# Altium PCB PCB1.PcbDoc
Units mm, origin at the board's own origin, x right, y up, seen from the top; angles counter-clockwise.
Board outline 95.25 x 74.25 mm, 2 copper layers (Top Layer, Bottom Layer); 41 components, 41 nets, 138 pads, 0 vias.
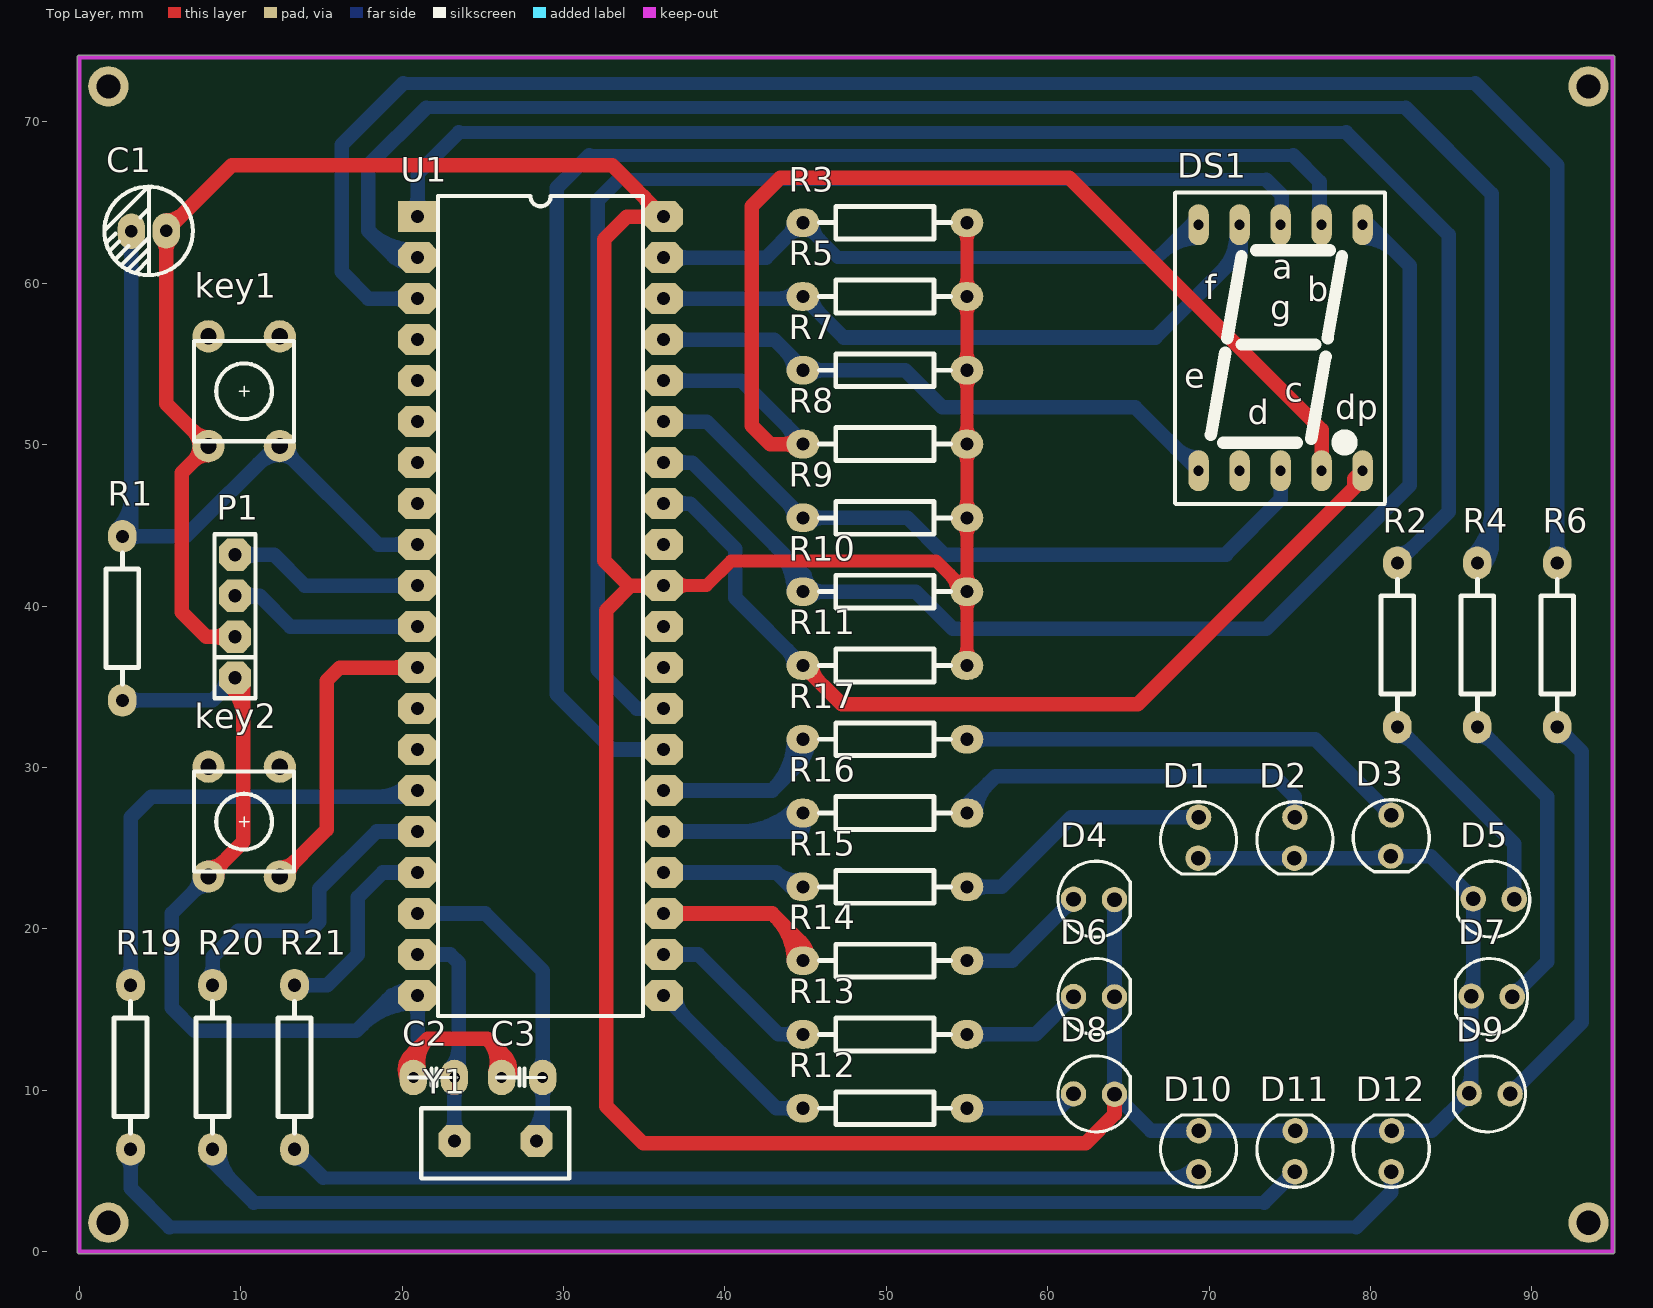
[diagram p0: Top Layer view]
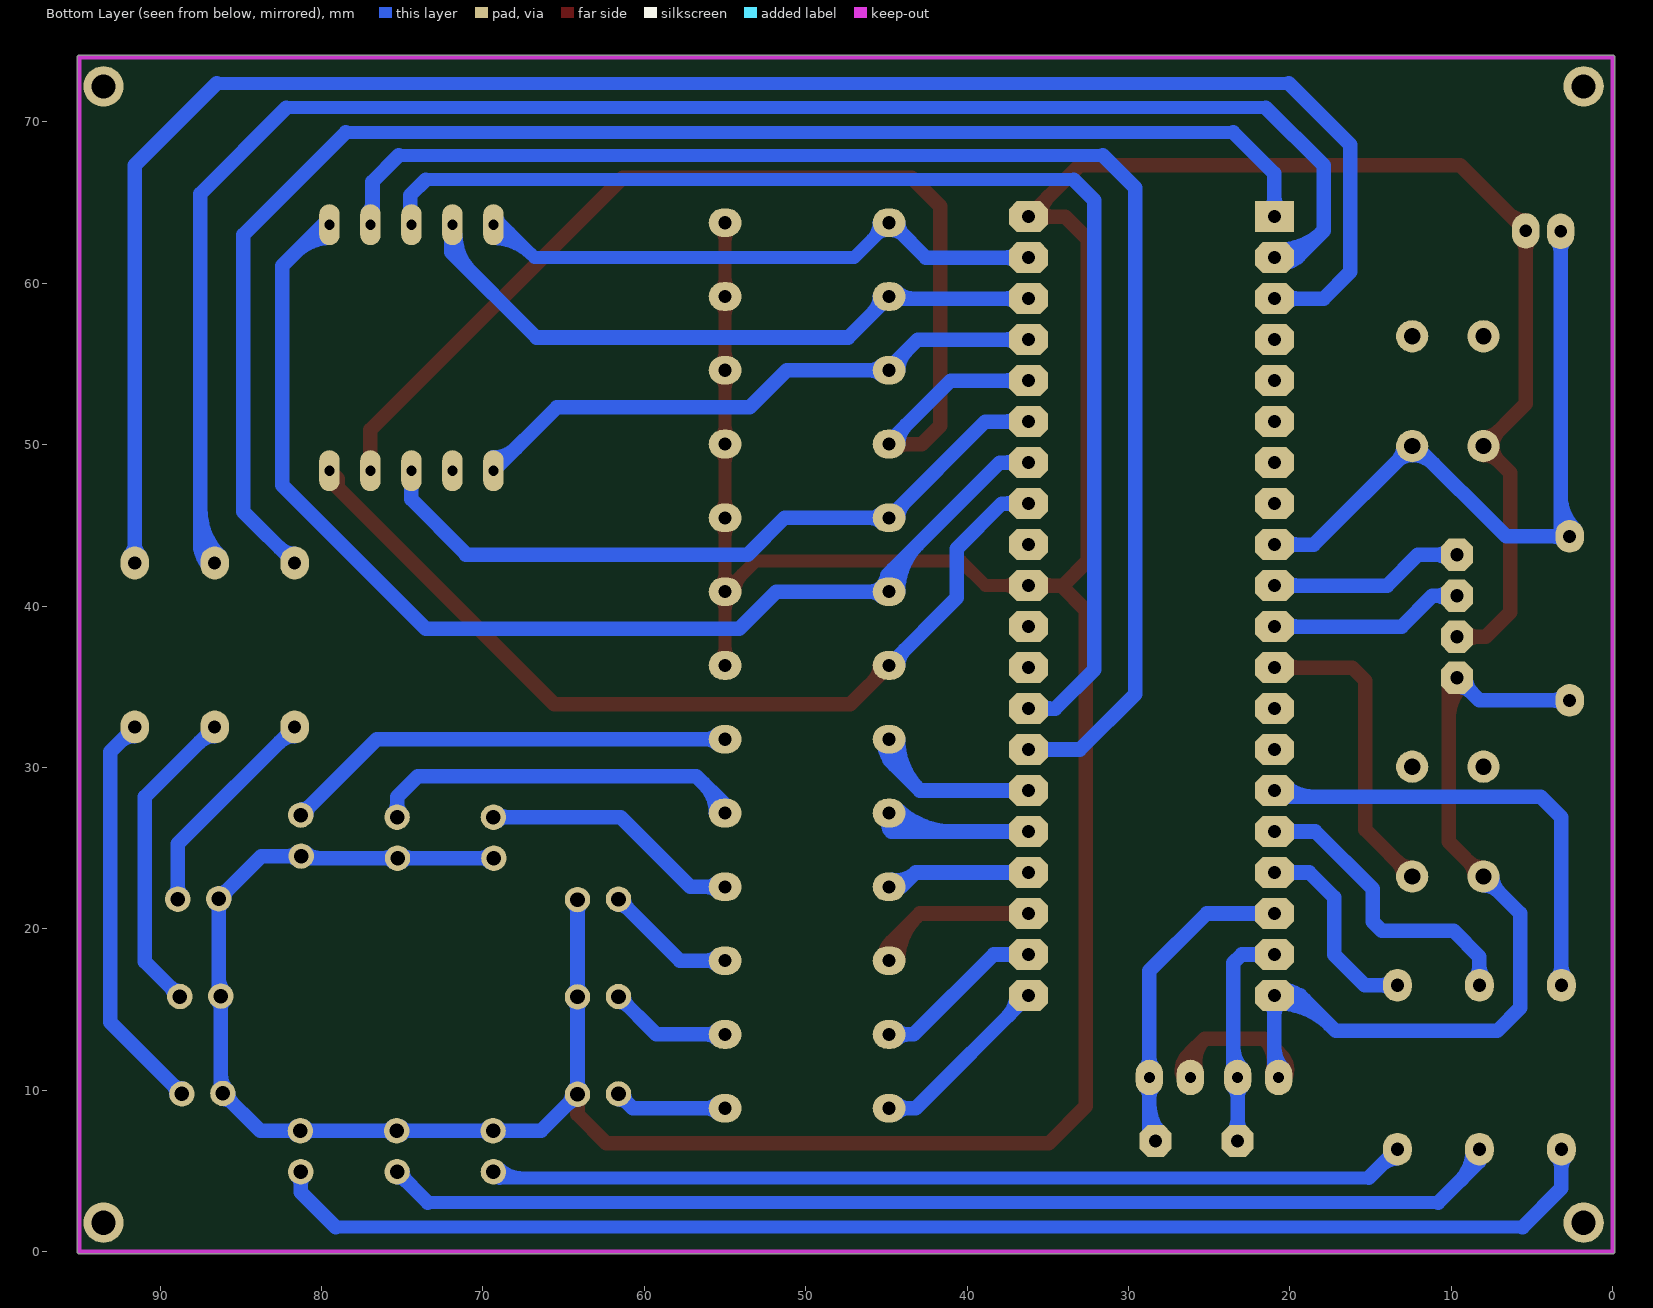
[diagram p1: Bottom Layer view, seen from below]

## Layer stack, top to bottom
Top Layer: signal copper 0.0356
Dielectric: dielectric 0.32, FR-4, Dk 4.8
Bottom Layer: signal copper 0.0356

## Board outline
-0.127,0 ccw(c0,0) 0,-0.127 95,-0.127 ccw(c95,0) 95.127,0 95.127,74 ccw(c95,74) 95,74.127 0,74.127 ccw(c0,74) -0.127,74

## Design rules (kind name [scope] priority, off if disabled: settings)
Clearance [All] p1: gap=0.381
PolygonConnect [All] p1: connectstyle=Relief reliefconductorwidth=0.254 reliefentries=4 polygonreliefangle="90 Angle"
RoutingVias [All] p1: holewidth=0.711 width=1.27 viastyle="Through Hole" minholewidth=0.711 minwidth=1.27 maxholewidth=0.711 maxwidth=1.27
SilkscreenOverComponentPads [All] p1: minsilkscreentomaskgap=0.254
SolderMaskExpansion [All] p1: expansion=0.102
Width power [InNetClass('power')] p1: maxlimit=1 minlimit=0.8 preferedwidth=0.8
Width [InNetClass('potong')] p2: maxlimit=1 minlimit=0.8 preferedwidth=0.8
27 further rules are at their usual default settings.

## Components (designator, comment, footprint, x,y, rotation, side; value= is the part's Value field where it differs from the comment)
C1 "电解电容" D50V10UF 5.334,63.246 r180 top
C2 "33p" D104 23.241,10.795 r180 top
C3 "33p" D104 28.702,10.795 r180 top
D1 "B_G" LED 69.342,24.384 r90 top
D2 "B_Y" LED 75.311,24.384 r90 top
D3 "B_R" LED 81.28,24.511 r90 top
D4 "X_G" LED 64.135,21.844 r180 top
D5 "D_R" LED 86.36,21.844 r0 top
D6 "X_Y" LED 64.135,15.811 r180 top
D7 "D_Y" LED 86.233,15.811 r0 top
D8 "X_R" LED 64.135,9.779 r180 top
D9 "D_G" LED 86.106,9.779 r0 top
D10 "N_R" LED 69.342,7.493 r270 top
D11 "N_Y" LED 75.311,7.493 r270 top
D12 "N_G" LED 81.28,7.493 r270 top
DS1 "YELLOWCC" 0.5INCH-DISP 69.342,48.387 r0 top
key1 "KEY" 6X6X? 8.001,49.911 r0 top
key2 "KEY" 6X6X? 8.001,23.241 r0 top
P1 "Header 4" SIP4 9.652,35.56 r180 top
R1 "10K" AXIAL0.4 2.667,39.243 r270 top
R2 "1K" AXIAL0.4 81.661,37.592 r270 top
R3 "10K" AXIAL0.4 49.911,63.754 r0 top
R4 "1K" AXIAL0.4 86.614,37.592 r270 top
R5 "10K" AXIAL0.4 49.911,59.182 r0 top
R6 "1K" AXIAL0.4 91.567,37.592 r270 top
R7 "10K" AXIAL0.4 49.911,54.61 r0 top
R8 "10K" AXIAL0.4 49.911,50.038 r0 top
R9 "10K" AXIAL0.4 49.911,45.466 r0 top
R10 "10K" AXIAL0.4 49.911,40.894 r0 top
R11 "10K" AXIAL0.4 49.911,36.322 r0 top
R12 "1K" AXIAL0.4 49.911,8.89 r0 top
R13 "1K" AXIAL0.4 49.911,13.462 r0 top
R14 "1K" AXIAL0.4 49.911,18.034 r0 top
R15 "1K" AXIAL0.4 49.911,22.606 r0 top
R16 "1K" AXIAL0.4 49.911,27.178 r0 top
R17 "1K" AXIAL0.4 49.911,31.75 r0 top
R19 "1K" AXIAL0.4 3.175,11.43 r90 top
R20 "1K" AXIAL0.4 8.255,11.43 r270 top
R21 "1K" AXIAL0.4 13.335,11.43 r270 top
U1 "STC89C52RC" DIP40C 20.955,64.135 r0 top
Y1 "XTAL" 晶振 23.241,6.858 r0 top

## Footprints (in the part's own frame and the unit in brackets; to place one, negate y for a bottom-side part, rotate by r counter-clockwise, add the part's x,y. Pads: shape width x height; smd on the part's side, far side on the other; paste and mask are expansions set on the pad)
0.5INCH-DISP [mm]
  oval 1.27x2.54 hole 0.635: a(0,15.24) b(2.54,15.24) c(0,0) d(7.62,0) dp(2.54,0) e(5.08,0) f(10.16,15.24) g(10.16,0) m1(5.08,15.24) m2(7.62,15.24)
  silkscreen extent -1.45,-2.06 11.56,17.25
6X6X? [mm]
  round 2 hole 1: 1(0,0) 2(4.42,0) 3(4.42,6.807) 4(0,6.807)
  silkscreen extent -0.89,0.3 5.31,6.5
AXIAL0.4 [mil]
  oval 80x70 hole 32: 1(-200,0) 2(200,0)
  silkscreen extent -160,-40 160,40
D50V10UF [mil]
  oval 66.93x86.61 hole 30: 1(-2,0) 2(83,1)
  silkscreen extent -67,-108 149,108
D104 [mm]
  oval 1.7x2.2 hole 0.7: 1(0,0) 2(2.54,0)
  silkscreen extent -0.15,-0.55 2.82,0.52
DIP40C [mm]
  rect 2.4x1.9 hole 0.813: 1(0,0)
  oct 2.4x1.9 hole 0.813: 2(0,-2.54) 3(0,-5.08) 4(0,-7.62) 5(0,-10.16) 6(0,-12.7) 7(0,-15.24) 8(0,-17.78) 9(0,-20.32) 10(0,-22.86) 11(0,-25.4) 12(0,-27.94) 13(0,-30.48) 14(0,-33.02) 15(0,-35.56) 16(0,-38.1) 17(0,-40.64) 18(0,-43.18) 19(0,-45.72) 20(0,-48.26) 21(15.24,-48.26) 22(15.24,-45.72) 23(15.24,-43.18) 24(15.24,-40.64) 25(15.24,-38.1) 26(15.24,-35.56) 27(15.24,-33.02) 28(15.24,-30.48) 29(15.24,-27.94) 30(15.24,-25.4) 31(15.24,-22.86) 32(15.24,-20.32) 33(15.24,-17.78) 34(15.24,-15.24) 35(15.24,-12.7) 36(15.24,-10.16) 37(15.24,-7.62) 38(15.24,-5.08) 39(15.24,-2.54) 40(15.24,0)
  silkscreen extent 1.27,-49.53 13.97,1.27
LED [mil]
  round 62 hole 35.43: 1(0,1) 2(100,0)
  silkscreen extent -38,-93 138,93
SIP4 [mm]
  oct 2x2 hole 0.813: 1(0,0) 2(0,-2.54) 3(0,-5.08) 4(0,-7.62)
  silkscreen extent -1.27,-8.89 1.27,1.27
晶振 [mm]
  oct 2x2 hole 0.8: 1(0,0) 2(5.08,0)
  silkscreen extent -2.06,-2.31 7.11,2.03

## Part data
C2 C3: library part 普通电容
D1 D2 D3 D4 D5 D6 D7 D8 D9 D10 D11 D12: library part LED
DS1: "Common Cathhode Seven-Segment Display, Right Hand Decimal"
P1: "Header, 4-Pin"
R1 R2 R3 R4 R5 R6 R7 R8 R9 R10 R11 R12 R13 R14 R15 R16 R17 R19 R20 R21: library part RES
U1: library part AT89C51
Y1: library part X

## Free pads (board coordinates)
  round 2.5 hole 1.5: 0(1.8,1.8) 0(1.8,72.2) 0(93.5,1.8) 0(93.5,72.2)

## Nets (pads, with @x,y where several pads share a name; then routed paths per layer and width w, separated by ;. In a path a pad name is that pad's centre, name@x,y a point inside that pad or via, vN(x,y) a via of type N, cw(c..) or ccw(c..) an arc to the next point about the centre after c; other vN are vias at no path point)
A: DS1.a R3.1 U1.39 | length 44.4
  Bottom Layer w0.8: R3.1 46.99,61.595 66.802,61.595 DS1.a@69.088,63.881 ; R3.1@44.958,63.265 cw(c44.958,62.391) 45.576,63.009 ; R3.1@45.447,63.754 ccw(c46.934,63.754) 45.883,62.702 ; 66.99,61.783 cw(c69.342,59.43) DS1.a@69.342,62.757 ; 68.355,63.148 cw(c69.342,62.162) DS1.a@69.342,63.557
  Bottom Layer w0.9: U1.39 42.545,61.595 R3.1@44.323,63.373 ; U1.39@36.799,61.241 cw(c37.652,60.388) 37.652,61.595 cw(c37.652,62.802) U1.39@36.799,61.949 ; R3.1@44.265,63.754 cw(c43.205,63.754) 43.955,63.005 cw(c44.704,62.255) R3.1@44.704,63.315 ; DS1.a@69.088,63.881 DS1.a
B: DS1.b R5.1 U1.38 | length 47.2
  Bottom Layer w0.9: U1.38 R5.1@44.704,59.055 ; U1.38@36.799,58.701 cw(c37.652,57.848) 37.652,59.055 cw(c37.652,60.262) U1.38@36.799,59.409 ; 43.338,59.055 ccw(c43.338,60.548) R5.1@44.394,59.492 ; R5.1 47.371,56.642 66.675,56.642 71.945,61.912 DS1.b@71.945,63.563 ; R5.1@45.397,59.182 ccw(c46.763,59.182) 45.797,58.216 ; 70.758,60.725 ccw(c68.491,62.992) DS1.b@71.697,62.992
B_G: D1.2 R15.2 | length 19.1
  Bottom Layer w0.9: R15.2 57.15,22.606 61.468,26.924 D1.2 ; R15.2@55.428,22.296 cw(c56.178,21.546) 56.178,22.606 cw(c56.178,23.666) R15.2@55.428,22.916 ; D1.2@69.103,26.685 ccw(c68.527,26.109) 68.527,26.924 ccw(c68.527,27.739) D1.2@69.103,27.163
B_R: D3.2 R17.2 | length 31.2
  Bottom Layer w0.9: R17.2 76.581,31.75 D3.2 ; R17.2@55.428,31.44 cw(c56.178,30.69) 56.178,31.75 cw(c56.178,32.81) R17.2@55.428,32.06 ; D3.2@80.943,27.051 ccw(c80.128,27.051) 80.704,27.627 ccw(c81.28,28.203) D3.2@81.28,27.388
B_Y: D2.2 R16.2 | length 26.7
  Bottom Layer w0.9: R16.2 54.991,27.686 56.769,29.464 74.041,29.464 75.311,28.194 D2.2 ; R16.2@55.557,27.178 cw(c58.15,27.178) 56.316,29.011 ; D2.2@75.072,27.163 ccw(c74.496,27.739) 75.311,27.739 ccw(c76.126,27.739) D2.2@75.55,27.163
C: DS1.c R7.1 U1.37 | length 42.9
  Bottom Layer w0.9: U1.37 43.053,56.515 R7.1@44.831,54.737 ; U1.37@36.799,56.161 cw(c37.652,55.308) 37.652,56.515 cw(c37.652,57.722) U1.37@36.799,56.869 ; 43.775,55.793 cw(c42.592,54.61) R7.1@44.265,54.61 ; R7.1 51.181,54.61 53.467,52.324 65.405,52.324 DS1.c ; R7.1@45.268,54.3 cw(c46.018,53.55) 46.018,54.61 cw(c46.018,55.67) R7.1@45.268,54.92 ; 67.942,49.787 ccw(c69.342,51.187) DS1.c@69.342,49.207
D: DS1.d R8.1 U1.36 | length 77.4
  Top Layer w0.9: R8.1@44.394,49.728 ccw(c43.644,48.978) 43.644,50.038 ccw(c43.644,51.098) R8.1@44.394,50.348 ; R8.1 42.799,50.038 41.656,51.181 41.656,64.77 43.434,66.548 61.341,66.548 76.962,50.927 DS1.d
  Bottom Layer w0.9: U1.36 41.021,53.975 R8.1@44.831,50.165 ; U1.36@36.799,53.621 cw(c37.652,52.768) 37.652,53.975 cw(c37.652,55.182) U1.36@36.799,54.329 ; 43.775,51.221 cw(c42.592,50.038) R8.1@44.265,50.038
D_G: D9.2 R6.2 | length 27.6
  Bottom Layer w0.9: D9.2 93.091,14.224 93.091,30.988 R6.2 ; D9.2@88.646,10.116 ccw(c88.646,10.931) 89.222,10.355 ccw(c89.798,9.779) D9.2@88.983,9.779 ; R6.2@91.567,31.946 cw(c91.567,30.58) 92.533,31.546
D_R: D5.2 R2.2 | length 16
  Bottom Layer w0.9: R2.2@81.661,31.946 cw(c81.661,30.58) 82.627,31.546 ; R2.2 88.9,25.273 D5.2 ; D5.2@88.661,22.083 ccw(c88.085,22.659) 88.9,22.659 ccw(c89.715,22.659) D5.2@89.139,22.083
D_Y: D7.2 R4.2 | length 21.7
  Bottom Layer w0.9: R4.2@86.614,31.946 cw(c86.614,30.58) 87.58,31.546 ; R4.2 90.932,28.194 90.932,17.97 D7.2 ; D7.2@88.773,16.149 ccw(c88.773,16.963) 89.349,16.387 ccw(c89.925,15.811) D7.2@89.11,15.811
E: DS1.e R9.1 U1.35 | length 49.3
  Bottom Layer w0.9: U1.35 38.862,51.435 R9.1@44.704,45.593 ; U1.35@36.799,51.081 cw(c37.652,50.228) 37.652,51.435 cw(c37.652,52.642) U1.35@36.799,51.789 ; 43.865,46.432 cw(c42.899,45.466) R9.1@44.265,45.466 ; R9.1 51.308,45.466 53.594,43.18 71.056,43.18 ; R9.1@45.268,45.156 cw(c46.018,44.406) 46.018,45.466 cw(c46.018,46.526) R9.1@45.268,45.776 ; 71.056,43.243 74.422,46.609 DS1.e
F: DS1.f R10.1 U1.34 | length 84.8
  Bottom Layer w0.9: U1.34 37.973,48.895 44.958,41.91 ; U1.34@36.799,48.541 cw(c37.652,47.688) 37.652,48.895 cw(c37.652,50.102) U1.34@36.799,49.249 ; 43.057,43.811 cw(c40.139,40.894) R10.1@44.265,40.894 ; 44.593,42.275 cw(c43.212,40.894) R10.1@45.165,40.894 ; R10.1@44.657,41.214 ccw(c44.002,41.91) 44.958,41.91 ; R10.1 51.816,40.894 54.102,38.608 73.533,38.608 82.423,47.498 82.423,61.087 DS1.f@79.692,63.817 ; R10.1@44.958,41.148 44.958,41.91 ; R10.1@45.259,41.214 cw(c45.914,41.91) 44.958,41.91 ; R10.1@45.268,40.584 cw(c46.018,39.834) 46.018,40.894 cw(c46.018,41.954) R10.1@45.268,41.204 ; DS1.f@79.502,62.807 cw(c79.502,59.908) 81.552,61.958 ; DS1.f@79.502,63.707 cw(c79.502,62.98) DS1.f@80.016,63.494
G: DS1.g R11.1 U1.33 | length 61.5
  Top Layer w0.9: R11.1 47.244,33.909 65.566,33.909 79.156,47.499 cw(c79.366,47.289) DS1.g@79.45,47.574 ; R11.1@45.397,36.322 ccw(c46.763,36.322) 45.797,35.356 ; 78.994,47.337 78.994,47.879 DS1.g cw(c79.646,48.243) DS1.g@79.703,48.438
  Bottom Layer w0.9: U1.33@36.195,46.203 U1.33 37.846,46.355 40.64,43.561 40.64,40.513 R11.1 ; U1.33@36.799,46.001 cw(c37.652,45.148) 37.652,46.355 cw(c37.652,47.562) U1.33@36.799,46.709 ; 43.865,37.288 cw(c42.899,36.322) R11.1@44.265,36.322
GND: C2.2 C3.2 key2.1 P1.1 R1.2 U1.20 | length 92.3
  Top Layer w0.9: key2.1 10.16,25.4 10.16,35.052 P1.1 ; key2.1@8.001,23.791 ccw(c8.001,25.119) 8.94,24.18 ccw(c9.879,23.241) key2.1@8.551,23.241 ; P1.1@9.263,35.171 cw(c7.098,33.006) 10.16,33.006 ; C2.2@20.223,10.897 cw(c21.42,11.267) 20.534,12.152 ; C2.2@20.418,11.328 ccw(c19.735,12.011) 20.701,12.011 ccw(c21.667,12.011) C2.2@20.984,11.328 ; C2.2 20.701,12.319 21.59,13.208 ; C2.2@21.083,11.163 cw(c23.033,11.765) 21.59,13.208 ; C3.2@25.78,11.163 ccw(c23.83,11.765) 25.273,13.208 ; C3.2@25.879,11.328 ccw(c25.196,12.011) 26.162,12.011 ccw(c27.128,12.011) C3.2@26.445,11.328 ; C3.2 26.162,12.319 25.273,13.208 ; 26.329,12.152 cw(c25.443,11.267) C3.2@26.64,10.897 ; 21.59,13.208 25.273,13.208
  Bottom Layer w0.9: R1.2 8.255,34.163 P1.1 ; R1.2@2.977,33.853 cw(c3.727,33.103) 3.727,34.163 cw(c3.727,35.223) R1.2@2.977,34.473 ; key2.1@7.451,23.241 cw(c6.123,23.241) 7.062,22.302 cw(c8.001,21.363) key2.1@8.001,22.691 ; key2.1 5.715,20.955 5.715,15.113 7.137,13.691 17.17,13.691 19.355,15.875 U1.20 20.955,11.049 C2.2 ; P1.1@9.102,35.56 cw(c7.774,35.56) 8.713,34.621 cw(c9.652,33.682) P1.1@9.652,35.01 ; 17.547,14.067 cw(c20.705,10.908) U1.20@20.705,15.375 ; 19.083,15.603 cw(c20.705,13.981) U1.20@20.705,16.275 ; U1.20@20.351,15.521 ccw(c19.498,14.668) 19.498,15.875 ccw(c19.498,17.082) U1.20@20.351,16.229 ; C2.2@20.418,11.328 ccw(c19.122,12.624) 20.955,12.624 ; U1.20@20.601,15.521 cw(c19.748,14.668) 20.955,14.668 cw(c22.162,14.668) U1.20@21.309,15.521
INT0: key2.2 U1.12 | length 23.3
  Top Layer w0.9: key2.2 15.316,26.137 15.316,35.382 16.129,36.195 U1.12 ; key2.2@12.421,23.791 ccw(c12.421,25.119) 13.36,24.18 ccw(c14.298,23.241) key2.2@12.971,23.241 ; U1.12@20.351,35.841 ccw(c19.498,34.988) 19.498,36.195 ccw(c19.498,37.402) U1.12@20.351,36.549
M1: DS1.m1 U1.28 | length 81.1
  Bottom Layer w0.8: 33.401,66.421 73.533,66.421
  Bottom Layer w0.9: 33.401,66.421 32.131,65.151 32.131,36.068 34.544,33.655 U1.28 ; U1.28@35.591,33.301 ccw(c34.738,32.448) 34.738,33.655 ccw(c34.738,34.862) U1.28@35.591,34.009 ; 73.533,66.421 74.486,65.468 DS1.m1@74.486,63.691
M2: DS1.m2 U1.27 | length 93.3
  Bottom Layer w0.8: 31.604,67.926 75.203,67.926
  Bottom Layer w0.9: 31.604,67.926 29.591,65.913 29.591,34.544 33.02,31.115 U1.27 ; U1.27@35.591,30.761 ccw(c34.738,29.908) 34.738,31.115 ccw(c34.738,32.322) U1.27@35.591,31.469 ; 75.203,67.926 76.835,66.294 DS1.m2@76.835,63.754 ; 76.835,65.015 ccw(c77.715,65.015) DS1.m2@77.093,64.393
N_G: D12.2 R19.1 | length 86.6
  Bottom Layer w0.8: 5.588,1.524 79.121,1.524
  Bottom Layer w0.9: R19.1@2.865,5.913 cw(c2.115,5.163) 3.175,5.163 cw(c4.235,5.163) R19.1@3.485,5.913 ; R19.1 3.175,3.937 5.588,1.524 ; 79.121,1.524 81.28,3.683 D12.2 ; D12.2@81.041,4.714 cw(c80.465,4.138) 81.28,4.138 cw(c82.095,4.138) D12.2@81.519,4.714
N_R: D10.2 R21.2 | length 59.7
  Bottom Layer w0.8: 15.113,4.572 D10.2@68.961,4.572 ; 67.487,4.572 ccw(c67.487,6.808) D10.2@69.068,5.227
  Bottom Layer w0.9: R21.2@13.335,5.784 cw(c13.335,4.418) 14.301,5.384 ; R21.2 15.113,4.572 ; D10.2@68.961,4.572 D10.2
N_Y: D11.2 R20.2 | length 73
  Bottom Layer w0.8: 10.795,3.048 73.406,3.048
  Bottom Layer w0.9: R20.2 8.255,5.588 10.795,3.048 ; R20.2@8.694,6.223 ccw(c11.287,6.223) 9.453,4.39 ; 73.406,3.048 D11.2 ; D11.2@74.974,4.953 cw(c74.159,4.953) 74.735,4.377 cw(c75.311,3.801) D11.2@75.311,4.616
NetR2_1: R2.1 U1.1 | length 94.8
  Bottom Layer w0.8: 23.495,69.342 78.486,69.342
  Bottom Layer w0.9: U1.1@20.601,64.489 ccw(c19.748,65.342) 20.955,65.342 ccw(c22.162,65.342) U1.1@21.309,64.489 ; U1.1 20.955,66.802 23.495,69.342 ; 78.486,69.342 84.836,62.992 84.836,45.847 R2.1 ; R2.1@81.661,43.238 ccw(c81.661,44.604) 82.627,43.638
NetR4_1: R4.1 U1.2 | length 115.3
  Bottom Layer w0.8: 21.482,70.885 82.169,70.885
  Bottom Layer w0.9: 19.434,61.719 ccw(c20.699,62.984) U1.2@20.707,61.195 ; U1.2@20.339,61.255 ccw(c19.558,60.53) 19.558,61.595 ; U1.2@20.339,61.935 cw(c19.558,62.66) 19.558,61.595 ; U1.2@20.703,62.095 cw(c20.686,66.024) 17.907,63.246 ; U1.2 19.558,61.595 ; 21.482,70.885 17.907,67.31 17.907,63.246 ; 82.169,70.885 87.503,65.532 87.503,43.561 R4.1 ; R4.1@86.304,43.109 ccw(c83.408,46.005) 87.503,46.005 ; R4.1@86.94,42.473 ccw(c85.581,43.832) 87.503,43.832 ; 17.907,63.246 19.558,61.595
NetR6_1: R6.1 U1.3 | length 120.4
  Bottom Layer w0.8: 20.066,72.39 86.487,72.39
  Bottom Layer w0.9: 20.066,72.39 16.256,68.58 16.256,60.706 17.907,59.055 U1.3 ; U1.3@20.351,58.701 ccw(c19.498,57.848) 19.498,59.055 ccw(c19.498,60.262) U1.3@20.351,59.409 ; 86.487,72.39 91.567,67.31 R6.1 ; R6.1@91.257,43.109 ccw(c90.507,43.859) 91.567,43.859 ccw(c92.627,43.859) R6.1@91.877,43.109
NetR12_1: R12.1 U1.21 | length 14.6
  Bottom Layer w0.9: U1.21 43.18,8.89 R12.1 ; U1.21@36.945,15.875 ccw(c38.756,15.875) 37.475,14.595 ; R12.1@44.394,8.58 ccw(c43.644,7.83) 43.644,8.89 ccw(c43.644,9.95) R12.1@44.394,9.2
NetR13_1: R13.1 U1.22 | length 14.2
  Bottom Layer w0.9: U1.22 38.354,18.415 43.307,13.462 R13.1 ; U1.22@36.799,18.061 cw(c37.652,17.208) 37.652,18.415 cw(c37.652,19.622) U1.22@36.799,18.769 ; R13.1@44.394,13.152 ccw(c43.644,12.402) 43.644,13.462 ccw(c43.644,14.522) R13.1@44.394,13.772
NetR14_1: R14.1 U1.23 | length 18.2
  Top Layer w0.9: U1.23 42.926,20.955 44.831,19.05 ; U1.23@36.799,20.601 cw(c37.652,19.748) 37.652,20.955 cw(c37.652,22.162) U1.23@36.799,21.309 ; 43.146,20.735 cw(c40.446,18.034) R14.1@44.265,18.034 ; R14.1@44.53,18.354 ccw(c43.875,19.05) 44.831,19.05 ; 44.683,19.198 cw(c43.519,18.034) R14.1@45.165,18.034 ; R14.1 44.831,19.05 ; R14.1@45.132,18.354 cw(c45.787,19.05) 44.831,19.05
NetR15_1: R15.1 U1.24 | length 12.5
  Bottom Layer w0.9: U1.24 43.18,23.495 ; U1.24@36.799,23.141 cw(c37.652,22.288) 37.652,23.495 cw(c37.652,24.702) U1.24@36.799,23.849 ; R15.1@44.628,23.038 cw(c44.343,24.658) 43.18,23.495 ; R15.1 44.069,22.606 43.18,23.495
NetR16_1: R16.1 U1.25 | length 19.2
  Bottom Layer w0.9: U1.25 44.704,26.035 44.831,26.162 ; U1.25@36.799,25.681 cw(c37.652,24.828) 37.652,26.035 cw(c37.652,27.242) U1.25@36.799,26.389 ; 40.885,26.035 ccw(c40.885,30.997) R16.1@44.394,27.488 ; 43.058,26.035 ccw(c43.058,28.824) R16.1@45.03,26.852 ; R16.1@44.53,26.858 cw(c43.875,26.162) 44.831,26.162 ; R16.1 44.831,26.162 ; R16.1@45.132,26.858 ccw(c45.787,26.162) 44.831,26.162
NetR17_1: R17.1 U1.26 | length 19.5
  Bottom Layer w0.9: U1.26 42.926,28.575 44.831,30.48 R17.1 ; U1.26@36.799,28.221 cw(c37.652,27.368) 37.652,28.575 cw(c37.652,29.782) U1.26@36.799,28.929 ; 42.967,28.616 ccw(c39.833,31.75) R17.1@44.265,31.75 ; 44.503,30.152 ccw(c42.905,31.75) R17.1@45.165,31.75 ; R17.1@44.521,31.44 cw(c43.771,30.69) 44.831,30.69 cw(c45.891,30.69) R17.1@45.141,31.44
NetR19_2: R19.2 U1.15 | length 32.5
  Bottom Layer w0.9: R19.2@2.865,16.947 ccw(c2.115,17.697) 3.175,17.697 ccw(c4.235,17.697) R19.2@3.485,16.947 ; R19.2 3.175,26.924 4.445,28.194 20.574,28.194 U1.15 ; 18.578,28.194 ccw(c18.578,30.702) U1.15@20.351,28.929
NetR20_1: R20.1 U1.16 | length 22.4
  Bottom Layer w0.9: R20.1@7.945,16.947 ccw(c7.195,17.697) 8.255,17.697 ccw(c9.315,17.697) R20.1@8.565,16.947 ; R20.1 8.255,18.288 9.855,19.888 14.3,19.888 14.859,20.447 14.859,22.479 18.415,26.035 U1.16 ; U1.16@20.351,25.681 ccw(c19.498,24.828) 19.498,26.035 ccw(c19.498,27.242) U1.16@20.351,26.389
NetR21_1: R21.1 U1.17 | length 16.2
  Bottom Layer w0.9: R21.1 15.367,16.51 17.247,18.39 17.247,21.946 18.796,23.495 U1.17 ; R21.1@13.645,16.2 cw(c14.395,15.45) 14.395,16.51 cw(c14.395,17.57) R21.1@13.645,16.82 ; U1.17@20.351,23.141 ccw(c19.498,22.288) 19.498,23.495 ccw(c19.498,24.702) U1.17@20.351,23.849
RESET: C1.2 key1.2 R1.1 U1.9 | length 53.2
  Bottom Layer w0.9: R1.1@2.357,44.76 ccw(c0.258,46.859) 3.226,46.859 ; C1.2@2.943,62.688 cw(c2.26,62.005) 3.226,62.005 cw(c4.191,62.005) C1.2@3.509,62.688 ; R1.1@2.977,44.013 cw(c3.727,43.263) 3.727,44.323 cw(c3.727,45.383) R1.1@2.977,44.633 ; C1.2 3.226,44.882 R1.1 6.604,44.323 12.192,49.911 key1.2 18.517,43.815 U1.9 ; 11.091,48.81 cw(c12.421,47.481) 12.421,49.361 cw(c12.421,48.033) 13.36,48.972 cw(c14.298,49.911) key1.2@12.971,49.911 ; U1.9@20.351,43.461 ccw(c19.498,42.608) 19.498,43.815 ccw(c19.498,45.022) U1.9@20.351,44.169
RXD: P1.4 U1.10 | length 16.1
  Bottom Layer w0.9: P1.4 12.065,43.18 13.97,41.275 U1.10 ; P1.4@10.041,42.791 cw(c10.98,41.852) 10.98,43.18 cw(c10.98,44.508) P1.4@10.041,43.569 ; U1.10@20.351,40.921 ccw(c19.498,40.068) 19.498,41.275 ccw(c19.498,42.482) U1.10@20.351,41.629
TXD: P1.3 U1.11 | length 16.1
  Bottom Layer w0.9: P1.3 11.176,40.64 13.081,38.735 U1.11 ; P1.3@10.041,40.251 cw(c10.98,39.312) 10.98,40.64 cw(c10.98,41.968) P1.3@10.041,41.029 ; U1.11@20.351,38.381 ccw(c19.498,37.528) 19.498,38.735 ccw(c19.498,39.942) U1.11@20.351,39.089
VCC: C1.1 D1.1 D2.1 D3.1 D4.1 D5.1 D6.1 D7.1 D8.1 D9.1 D10.1 D11.1 D12.1 key1.1 P1.2 R3.2 R5.2 R7.2 R8.2 R9.2 R10.2 R11.2 U1.31 U1.40 | length 341.8
  Top Layer w0.8: U1.31 38.862,41.275 40.386,42.799 53.086,42.799 R10.2 ; U1.31@36.834,40.886 cw(c37.773,39.947) 37.773,41.275 cw(c37.773,42.603) U1.31@36.834,41.664 ; 53.939,41.946 cw(c52.888,40.894) R10.2@54.375,40.894 ; 54.246,41.639 ccw(c54.864,42.257) R10.2@54.864,41.383 ; R11.2@54.645,36.668 ccw(c53.81,37.503) 54.991,37.503 ccw(c56.172,37.503) R11.2@55.337,36.668 ; R10.2@54.645,40.548 cw(c53.81,39.713) 54.991,39.713 cw(c56.172,39.713) R10.2@55.337,40.548 ; R10.2@54.645,41.24 ccw(c53.81,42.075) 54.991,42.075 ccw(c56.172,42.075) R10.2@55.337,41.24 ; R9.2@54.645,45.12 cw(c53.81,44.285) 54.991,44.285 cw(c56.172,44.285) R9.2@55.337,45.12 ; R9.2@54.645,45.812 ccw(c53.81,46.647) 54.991,46.647 ccw(c56.172,46.647) R9.2@55.337,45.812 ; R8.2@54.645,49.692 cw(c53.81,48.857) 54.991,48.857 cw(c56.172,48.857) R8.2@55.337,49.692 ; R8.2@54.645,50.384 ccw(c53.81,51.219) 54.991,51.219 ccw(c56.172,51.219) R8.2@55.337,50.384 ; R7.2@54.645,54.264 cw(c53.81,53.429) 54.991,53.429 cw(c56.172,53.429) R7.2@55.337,54.264 ; R7.2@54.645,54.956 ccw(c53.81,55.791) 54.991,55.791 ccw(c56.172,55.791) R7.2@55.337,54.956 ; R5.2@54.645,58.836 cw(c53.81,58.001) 54.991,58.001 cw(c56.172,58.001) R5.2@55.337,58.836 ; R5.2@54.645,59.528 ccw(c53.81,60.363) 54.991,60.363 ccw(c56.172,60.363) R5.2@55.337,59.528 ; R3.2@54.645,63.408 cw(c53.81,62.573) 54.991,62.573 cw(c56.172,62.573) R3.2@55.337,63.408 ; R11.2 R10.2 ; R3.2 R5.2 R7.2 R8.2 R9.2 R10.2
  Top Layer w0.9: C1.1@5.102,62.713 cw(c4.419,62.03) 5.385,62.03 cw(c6.35,62.03) C1.1@5.668,62.713 ; C1.1@5.385,63.896 ccw(c5.385,65.465) 6.494,64.356 ; key1.1@8.001,49.361 ccw(c8.001,48.033) 7.062,48.972 ccw(c6.123,49.911) 7.451,49.911 ccw(c6.123,49.911) 7.062,50.85 ccw(c8.001,51.789) key1.1@8.001,50.461 ; P1.2@9.263,37.711 ccw(c8.324,36.772) 8.324,38.1 ccw(c8.324,39.428) P1.2@9.263,38.489 ; P1.2 7.874,38.1 6.35,39.624 6.35,48.26 key1.1 5.385,52.527 C1.1 9.449,67.31 33.02,67.31 U1.40 33.909,64.135 32.512,62.738 32.512,42.799 34.036,41.275 34.163,41.275 ; 34.915,65.415 cw(c33.634,64.135) U1.40@35.445,64.135 ; U1.31@35.591,40.921 ccw(c34.738,40.068) 34.738,41.275 ccw(c34.738,42.482) U1.31@35.591,41.629 ; U1.40@35.591,63.781 ccw(c34.738,62.928) 34.738,64.135 ccw(c34.738,65.342) U1.40@35.591,64.489 ; U1.31 34.163,41.275 ; D8.1@63.896,9.515 cw(c63.32,8.939) 64.135,8.939 cw(c64.95,8.939) D8.1@64.374,9.515 ; D8.1 64.135,8.509 62.357,6.731 34.925,6.731 32.639,9.017 32.639,39.751 34.163,41.275
  Bottom Layer w0.9: D8.1@63.896,9.992 ccw(c63.32,10.568) 64.135,10.568 ccw(c64.95,10.568) D8.1@64.374,9.992 ; D6.1@63.896,15.548 cw(c63.32,14.972) 64.135,14.972 cw(c64.95,14.972) D6.1@64.374,15.548 ; D6.1@63.896,16.025 ccw(c63.32,16.601) 64.135,16.601 ccw(c64.95,16.601) D6.1@64.374,16.025 ; D4.1@63.896,21.58 cw(c63.32,21.004) 64.135,21.004 cw(c64.95,21.004) D4.1@64.374,21.58 ; D8.1@64.135,9.416 cw(c64.135,8.602) 64.711,9.178 cw(c65.287,9.754) D8.1@64.472,9.754 ; D4.1 D6.1 D8.1 66.396,7.493 D10.1 D11.1 D12.1 83.795,7.493 D9.1 86.233,9.931 D7.1 86.36,15.964 D5.1 83.718,24.511 D3.1 81.128,24.384 D2.1 D1.1 ; D10.1@69.129,7.254 ccw(c68.553,6.678) 68.553,7.493 ccw(c68.553,8.308) D10.1@69.129,7.732 ; D1.1@69.555,24.145 cw(c70.131,23.569) 70.131,24.384 cw(c70.131,25.199) D1.1@69.555,24.623 ; D10.1@69.606,7.254 cw(c70.182,6.678) 70.182,7.493 cw(c70.182,8.308) D10.1@69.606,7.732 ; D2.1@75.047,24.145 ccw(c74.471,23.569) 74.471,24.384 ccw(c74.471,25.199) D2.1@75.047,24.623 ; D11.1@75.098,7.254 ccw(c74.522,6.678) 74.522,7.493 ccw(c74.522,8.308) D11.1@75.098,7.732 ; D2.1@75.524,24.145 cw(c76.1,23.569) 76.1,24.384 cw(c76.1,25.199) D2.1@75.524,24.623 ; D11.1@75.575,7.254 cw(c76.151,6.678) 76.151,7.493 cw(c76.151,8.308) D11.1@75.575,7.732 ; 80.133,24.384 ccw(c80.133,25.632) D3.1@81.016,24.75 ; D12.1@81.067,7.254 ccw(c80.491,6.678) 80.491,7.493 ccw(c80.491,8.308) D12.1@81.067,7.732 ; D3.1@81.493,24.272 cw(c82.069,23.696) 82.069,24.511 cw(c82.069,25.326) D3.1@81.493,24.75 ; D12.1@81.544,7.254 cw(c82.12,6.678) 82.12,7.493 cw(c82.12,8.308) D12.1@81.544,7.732 ; D9.1@85.769,9.804 cw(c84.954,9.804) 85.53,9.228 cw(c86.106,8.652) D9.1@86.106,9.467 ; D9.1@85.867,10.043 ccw(c84.985,10.926) 86.233,10.926 ; D7.1@85.994,15.598 cw(c85.418,15.022) 86.233,15.022 cw(c87.048,15.022) D7.1@86.472,15.598 ; D7.1@85.994,16.075 ccw(c85.112,16.958) 86.36,16.958 ; D5.1@86.023,21.869 ccw(c85.208,21.869) 85.784,22.445 ccw(c86.36,23.021) D5.1@86.36,22.207 ; D5.1@86.121,21.631 cw(c85.545,21.055) 86.36,21.055 cw(c87.175,21.055) D5.1@86.599,21.631
X1: C2.1 U1.19 Y1.1 | length 20.8
  Bottom Layer w0.9: U1.19 22.987,18.415 23.495,17.907 23.495,11.049 C2.1 Y1.1 ; U1.19@21.559,18.061 cw(c22.412,17.208) 22.412,18.415 cw(c22.412,19.622) U1.19@21.559,18.769 ; Y1.1@22.852,7.247 ccw(c21.913,8.186) 23.241,8.186 ccw(c24.569,8.186) Y1.1@23.63,7.247 ; C2.1@22.958,10.262 cw(c22.275,9.579) 23.241,9.579 cw(c24.207,9.579) C2.1@23.524,10.262 ; C2.1@22.958,11.328 ccw(c21.662,12.624) 23.495,12.624
X2: C3.1 U1.18 Y1.2 | length 26.9
  Bottom Layer w0.9: U1.18 25.146,20.955 28.702,17.399 C3.1 28.702,7.239 Y1.2 ; U1.18@21.559,20.601 cw(c22.412,19.748) 22.412,20.955 cw(c22.412,22.162) U1.18@21.559,21.309 ; Y1.2@27.932,7.247 ccw(c26.073,9.106) 28.702,9.106 ; C3.1@28.419,10.262 cw(c27.736,9.579) 28.702,9.579 cw(c29.668,9.579) C3.1@28.985,10.262 ; C3.1@28.419,11.328 ccw(c27.736,12.011) 28.702,12.011 ccw(c29.668,12.011) C3.1@28.985,11.328
X_G: D4.2 R14.2 | length 11.1
  Bottom Layer w0.9: R14.2 57.785,18.034 D4.2 ; R14.2@55.428,17.724 cw(c56.178,16.974) 56.178,18.034 cw(c56.178,19.094) R14.2@55.428,18.344 ; D4.2@61.258,21.844 cw(c60.443,21.844) 61.019,21.268 cw(c61.595,20.692) D4.2@61.595,21.507
X_R: D8.2 R12.2 | length 9.9
  Bottom Layer w0.9: R12.2 60.706,8.89 D8.2 ; R12.2@55.428,8.58 cw(c56.178,7.83) 56.178,8.89 cw(c56.178,9.95) R12.2@55.428,9.2 ; D8.2@61.258,9.779 cw(c60.443,9.779) 61.019,9.203 cw(c61.595,8.627) D8.2@61.595,9.442
X_Y: D6.2 R13.2 | length 10.5
  Bottom Layer w0.9: R13.2 59.245,13.462 D6.2 ; R13.2@55.428,13.152 cw(c56.178,12.402) 56.178,13.462 cw(c56.178,14.522) R13.2@55.428,13.772 ; D6.2@61.258,15.811 cw(c60.443,15.811) 61.019,15.236 cw(c61.595,14.66) D6.2@61.595,15.474
pads on no net: DS1.dp key1.3 key1.4 key2.3 key2.4 U1.4 U1.5 U1.6 U1.7 U1.8 U1.13 U1.14 U1.29 U1.30 U1.32

## Keep-outs
Keep-Out Layer:
  lines w0.254: 0,0 95,0 95,74 0,74 0,0

## Text inside footprints (layer, text, board x,y; h text height)
DS1: Top Overlay "f" at 69.723,59.004 h1.52; Top Overlay "b" at 76.073,58.877 h1.52; Top Overlay "g" at 73.787,57.734 h1.52; Top Overlay "a" at 73.914,60.274 h1.52; Top Overlay "d" at 72.39,51.257 h1.52; Top Overlay "e" at 68.453,53.543 h1.52; Top Overlay "dp" at 77.826,51.587 h1.52; Top Overlay "c" at 74.676,52.654 h1.52